# EAGLE board 2017-09-15_drum_circuits (EAGLE 9.0.1)
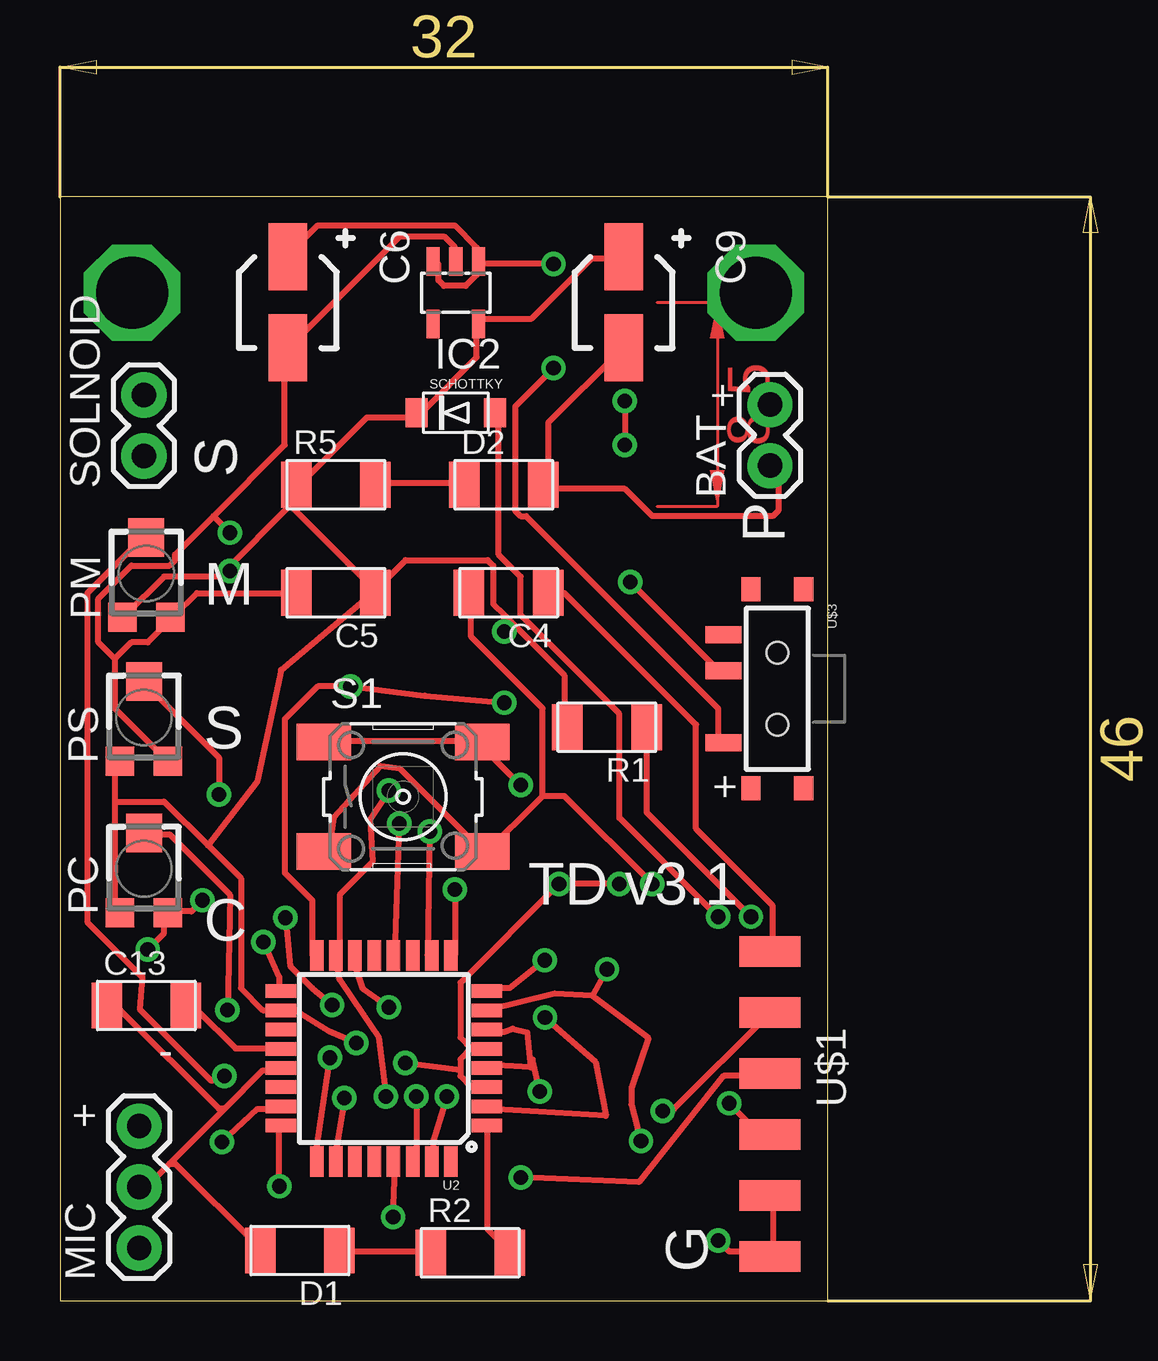
[diagram p0: board, top side]
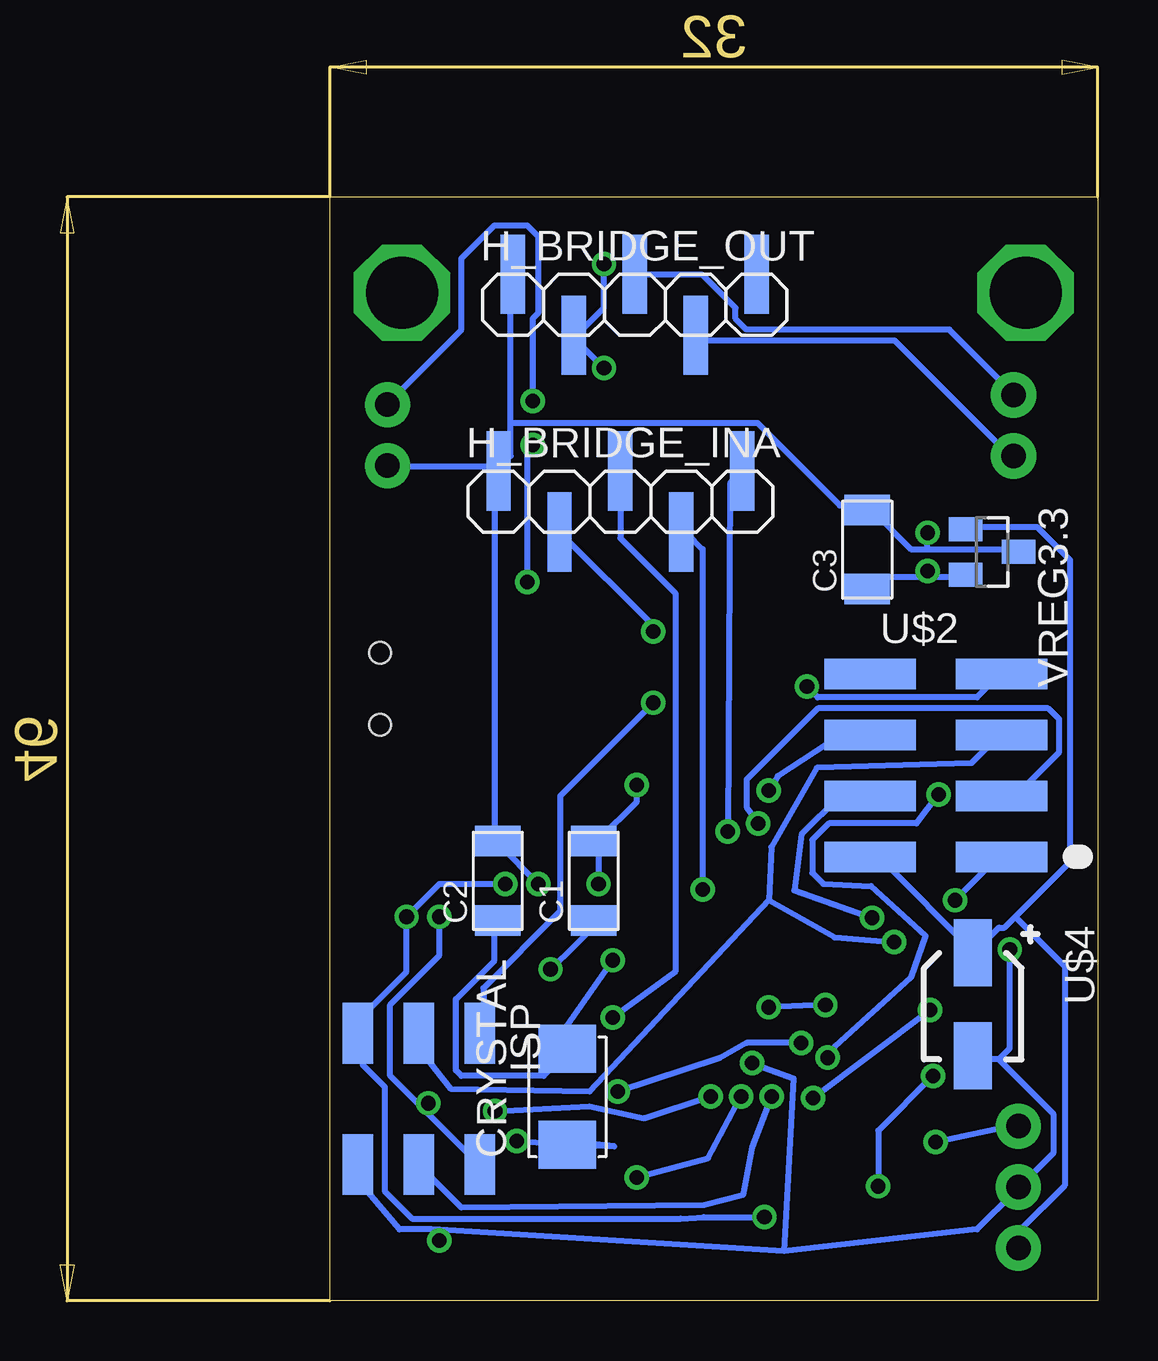
[diagram p1: board, bottom side, seen from below]

Size 32 x 46 mm. Coordinates in mm from the lower left corner, seen from the top.
Outline: 0,0 32,0 32,46 0,46 0,0
Copper layers (1*16): Top 0.035mm / dielectric 1.5mm / Bottom 0.035mm
Design rules "default": minimum track width 10mil, minimum drill 24mil, track to track 8mil, track to pad 8mil, pad to pad 8mil, via to via 8mil, smd to smd 8mil, copper to edge 40mil, drill to drill 8mil, minimum pad ring 10mil, minimum via ring 8mil, stop-mask expansion 4mil, vias tented up to drill 0mil, thermal gap 10mil

## Footprints (pad centres in the part's own frame; a part is rotated, then mirrored left to right if it is on the bottom)
1X02 = drill 1.016 pad 1.88: 1 0,0; 2 2.54,0
C1206FAB = smd 1.27 x 1.905: 1 -1.651,0; 2 1.651,0
PANASONIC-CAP-SMD-B = smd 1.6 x 2.794: NEG 0,3.794; POS 0,0
2-SMD-5X3MM = smd 2 x 2.4: P$1 -2,0; P$2 2,0
LED1206FAB = smd 1.27 x 1.905: 1 -1.651,0; 2 1.651,0
1X05SMD = smd 1.016 x 3.302: 1 -1.27,1.27; 2 1.27,-1.27; 3 3.81,1.27; 4 6.35,-1.27; 5 8.89,1.27
SOT23-5L = smd 0.55 x 1.2: 1 -0.95,-1.3; 2 0,-1.3; 3 0.95,-1.3; 4 0.95,1.3; 5 -0.95,1.3
2X03SMD = smd 2.54 x 1.27: 1 -2.54,2.54; 2 2.92,2.54; 3 -2.54,0; 4 2.92,0; 5 -2.54,-2.54; 6 2.92,-2.54
1X03 = drill 1.016 pad 1.88: 1 0,0; 2 2.54,0; 3 5.08,0
TC33X = smd 1.2 x 1.2: 1 -1,-1.825; 3 1,-1.825 | smd 1.5 x 1.6: 2 0,1.5
R1206FAB = smd 1.27 x 1.905: 1 -1.651,0; 2 1.651,0
6MM_SWITCH = smd 2.286 x 1.524: 1 -3.302,2.286; 2 3.302,2.286; 3 -3.302,-2.286; 4 3.302,-2.286
SOD-123FL = smd 0.91 x 1.22: A 1.637,0; C -1.637,0
TQFP32-08 = smd 1.27 x 0.559: 1 -4.293,2.8; 2 -4.293,2; 3 -4.293,1.2; 4 -4.293,0.4; 5 -4.293,-0.4; 6 -4.293,-1.2; 7 -4.293,-2; 8 -4.293,-2.8; 17 4.293,-2.8; 18 4.293,-2; 19 4.293,-1.2; 20 4.293,-0.4; 21 4.293,0.4; 22 4.293,1.2; 23 4.293,2; 24 4.293,2.8 | smd 0.559 x 1.27: 9 -2.8,-4.293; 10 -2,-4.293; 11 -1.2,-4.293; 12 -0.4,-4.293; 13 0.4,-4.293; 14 1.2,-4.293; 15 2,-4.293; 16 2.8,-4.293; 25 2.8,4.293; 26 2,4.293; 27 1.2,4.293; 28 0.4,4.293; 29 -0.4,4.293; 30 -1.2,4.293; 31 -2,4.293; 32 -2.8,4.293
1X06SMD = smd 2.54 x 1.27: 1 0,6.35; 2 0,3.81; 3 0,1.27; 4 0,-1.27; 5 0,-3.81; 6 0,-6.35
2.54MM = smd 3.81 x 1.27: 1 0,0; 2 -5.486,0; 3 0,2.54; 4 -5.486,2.54; 5 0,5.08; 6 -5.486,5.08; 7 0,7.62; 8 -5.486,7.62
KPS-1290 = smd 0.7 x 1.5: O -2.25,2.25; P 0.75,2.25; S 2.25,2.25 | smd 1 x 0.8: P$1 -4.15,1.1; P$2 -4.15,-1.1; P$3 4.15,-1.1; P$4 4.15,1.1 | hole 0.9: -1.5,0; 1.5,0
PANASONIC-CAP-SMD-C = smd 1.6 x 2.794: NEG 0,4.294; POS 0,0
SOT23 = smd 1 x 1.4: 1 -0.95,-1.1; 2 0.95,-1.1; 3 0,1.1

## Placement (x,y rotation side)
BAT  [1X02]  29.6,34.8 90 top
C1  22pF  [C1206FAB]  21,17.5 90 bottom
C2  22pF  [C1206FAB]  25,17.5 90 bottom
C3  0.1uF  [C1206FAB]  9.6,31.3 90 bottom
C4  0.1uF  [C1206FAB]  18.7,29.5 180 top
C5  1uF  [C1206FAB]  11.5,29.5 180 top
C6  10uF  [PANASONIC-CAP-SMD-B]  9.5,43.5 180 top
C9  10uF  [PANASONIC-CAP-SMD-B]  23.5,43.5 180 top
C13  0.1uF  [C1206FAB]  3.6,12.3 0 top
CRYSTAL  16MHz  [2-SMD-5X3MM]  22.1,8.5 90 bottom
D1  LEDFAB1206  [LED1206FAB]  10,2.1 180 top
D2  LEDFAB1206  [LED1206FAB]  18.5,34 0 top
H_BRIDGE_INA  [1X05SMD]  23.7,33.3 0 bottom
H_BRIDGE_OUT  [1X05SMD]  23.1,41.5 0 bottom
IC2  MIC5225-5v  [SOT23-5L]  16.5,42 180 top
ISP  [2X03SMD]  28.3,8.6 270 bottom
MIC  [1X03]  3.3,2.2 90 top
PC  [TC33X]  3.5,18 0 top
PM  [TC33X]  3.6,30.3 0 top
PS  [TC33X]  3.5,24.3 0 top
R1  10k  [R1206FAB]  22.8,23.9 180 top
R2  500  [R1206FAB]  17.1,2 0 top
R5  500  [R1206FAB]  11.5,34 0 top
S1  [6MM_SWITCH]  14.3,21 0 top
SCHOTTKY  [SOD-123FL]  16.5,37 0 top
SOLNOID  [1X02]  3.5,35.2 90 top
U2  ATMEGA328P_TQFP  [TQFP32-08]  13.5,10.1 180 top
U$1  FTDI-SMD-HEADER  [1X06SMD]  29.6,8.2 180 top
U$2  NRFHEADSMD  [2.54MM]  4,18.5 0 bottom
U$3  SWITCH_SPDT  [KPS-1290]  29.9,25.5 90 top
U$4  33uF  [PANASONIC-CAP-SMD-C]  5.2,14.5 180 bottom
VREG3.3  LD1117  [SOT23]  4.4,31.2 270 bottom

## Library data of the parts
BAT MIC SOLNOID = SparkFun-Connectors
C1-C5 C13 CRYSTAL D1 D2 ISP R1 R2 R5 S1 U$1 VREG3.3 = fab
C6 C9 U$4 = talkingdrums
H_BRIDGE_INA H_BRIDGE_OUT = pinhead-2
IC2 PC PM PS SCHOTTKY = adafruit
U2 = SparkFun-DigitalIC; PROD_ID: IC-09069
U$2 = nrf
U$3 = SparkFun-Electromechanical; PROD_ID: SWCH-10651

## Nets
3.3V: MIC.1 U$2.2 U$4.POS VREG3.3.1
5V: C3.1 C5.1 C9.POS H_BRIDGE_INA.2 IC2.5 PC.1 PM.1 PS.1 R1.2 R5.1 SCHOTTKY.C U2.4 U2.6 U2.18 VREG3.3.2
BAT_IN: BAT.2 U$3.P
CE: U2.12 U$2.3
CSN: U2.14 U$2.4
DTR: C4.1 U$1.6
ENABLE: H_BRIDGE_INA.3 U2.2
GND: BAT.1 C1.2 C2.2 C3.2 C5.2 C6.NEG C9.NEG C13.1 D1.2 D2.2 H_BRIDGE_INA.1 H_BRIDGE_OUT.1 IC2.2 ISP.6 MIC.2 PC.3 PM.3 PS.3 S1.1 S1.2 U2.3 U2.5 U2.21 U$1.1 U$1.2 U$2.1 U$4.NEG VREG3.3.3
MIC: MIC.3 U2.23
MISO: ISP.1 U2.16 U$2.7
MOSI: ISP.4 U2.15 U$2.6
N$1: D1.1 R2.1
N$6: D2.1 R5.2
N$9: C13.2 U2.20
N$10: R2.2 U2.1
OUT: U$3.S
PHASE: H_BRIDGE_INA.4 U2.9
PM: PM.2 U2.24
POT_C: PC.2 U2.26
POT_S: PS.2 U2.25
RST: C4.2 ISP.5 R1.1 S1.3 S1.4 U2.29
RX: U2.31 U$1.5
SCK: ISP.3 U2.17 U$2.5
SLEEP: H_BRIDGE_INA.5 U2.10
SOL_1: H_BRIDGE_OUT.4 SOLNOID.1
SOL_2: H_BRIDGE_OUT.3 SOLNOID.2
TX: U2.30 U$1.4
VBUS: ISP.2 SCHOTTKY.A U$1.3
VCC: C6.POS H_BRIDGE_OUT.2 IC2.1 IC2.3 U$3.O
VM: H_BRIDGE_OUT.5
XTAL1: C1.1 CRYSTAL.P$1 U2.7
XTAL2: C2.1 CRYSTAL.P$2 U2.8

## Tracks (layer width: path | path; a pad name or v marks a point on that pad's centre or on a via)
3.3V
  Bottom 0.254: 3.43,16 3.89,15.54 4.12,15.54 5.03,14.63 U$4.POS 5.26,14.63 8.91,18.29 9.37,18.29 U$2.2 | 3.43,16 1.14,18.29 1.14,30.86 2.52,32.23 5.49,32.23 VREG3.3.1 | 3.43,16 1.37,13.95 1.37,4.8 3.2,2.97 3.2,2.29 MIC.1
5V  (via drill 0.61)
  Top 0.254: 19.62,9.73 17.83,9.83 U2.4 | 19.62,9.73 19.47,11.19 18.87,11.34 18.52,11.2 17.83,11.2 U2.6 | 2.29,20.8 2.29,22.4 PS.1 | 2.29,20.8 2.29,16.23 PC.1 | 6.17,18.97 4.34,20.8 2.29,20.8 | 6.17,18.97 7.54,17.6 7.54,13.03 8.46,12.12 9.14,12.12 U2.18 9.37,12.12 9.83,12.12 11.2,11.24 v12.36,10.74 | 19.62,9.73 19.7,10.04 v20,8.71 | C9.POS 23.32,43.43 22.17,43.43 19.66,40.92 17.6,40.92 IC2.5 17.37,40.69 17.37,39.32 15.09,37.03 SCHOTTKY.C 14.86,36.8 12.8,36.8 10.06,34.06 R5.1 | 9.6,33.15 9.83,33.38 9.83,33.83 R5.1 | 9.6,33.15 6.86,30.4 | 6.86,30.4 6.63,30.18 4.34,30.18 2.74,28.57 PM.1 | 6.86,30.4 v7.09,30.4 | 18.52,28.57 18.06,29.03 18.06,30.63 17.83,30.86 14.4,30.86 13.26,29.72 C5.1 | 18.52,28.57 21.03,26.06 21.03,24 R1.2 | 18.52,28.57 v18.52,27.89 | 9.6,33.15 13.03,29.72 C5.1 | 9.6,33.15 R5.1 | 6.17,18.97 8.21,21.62 9.21,26.27 13.03,29.49 C5.1
  Bottom 0.254: v20,8.71 15.76,10.12 14.63,10.74 v12.36,10.74 | 7.09,30.18 8.91,30.18 9.37,29.72 C3.1 | 7.09,30.18 5.71,30.18 VREG3.3.2 | v7.09,30.4 7.09,30.18 | v18.52,27.89 18.52,28.12 22.4,32 H_BRIDGE_INA.2
BAT_IN  (via drill 0.61)
  Top 0.254: v23.77,29.95 27.43,26.29 U$3.P | v23.55,37.49 v23.55,35.66
  Bottom 0.254: v23.77,29.95 23.77,35.43 v23.55,35.66 | v23.55,37.49 23.55,40.92 23.32,41.15 23.32,44.35 23.77,44.81 25.15,44.81 26.52,43.43 26.52,40.46 29.49,37.49 BAT.2
CE  (via drill 0.61)
  Top 0.254: v14.14,19.89 13.95,14.4 U2.12
  Bottom 0.254: v14.14,19.89 14.63,20.57 14.63,21.72 11.66,24.69 2.06,24.69 1.6,24.23 1.6,22.86 3.2,21.26 3.89,21.26 U$2.3
CSN  (via drill 0.61)
  Top 0.254: v13.7,12.23 12.64,12.99 12.24,14.17 U2.14 | v11.34,12.33 10.52,13.03 9.6,13.95 v9.4,15.96
  Bottom 0.254: v11.34,12.33 v13.7,12.23 | v9.4,15.96 12.64,17.1 12.34,19.43 10.74,21.03 9.6,21.03 U$2.4
DTR
  Top 0.254: C4.1 20.57,29.49 21.03,29.49 26.52,24 26.52,19.66 29.72,16.46 29.72,14.63 U$1.6
ENABLE  (via drill 0.61)
  Top 0.254: v20.22,11.8 22.32,9.96 22.76,7.7 17.83,8 U2.2
  Bottom 0.254: v20.22,11.8 17.6,13.72 17.6,29.49 19.89,31.77 19.89,34.52 H_BRIDGE_INA.3
GND  (via drill 0.61)
  Top 0.254: v5.94,16.69 5.49,16.23 4.57,16.23 PC.3 4.34,16 4.34,15.32 v3.66,14.63 | U$1.2 29.72,4.34 29.72,2.06 U$1.1 29.49,2.06 27.89,2.06 v27.43,2.52 | 4.57,5.71 3.43,4.57 MIC.2 | 4.57,5.71 6.86,8 | 6.86,8 8.46,9.6 9.14,9.6 U2.21 | 4.57,5.71 4.8,5.71 8.23,2.29 D1.2 | 6.86,8 6.63,8 2.52,12.12 C13.1 | IC2.2 16.46,43.43 16.46,43.89 16,44.35 14.17,44.35 9.6,39.78 C6.NEG 9.37,39.55 9.37,35.66 6.4,32.69 | 2.29,26.75 2.29,24.69 4.34,22.63 PS.3 | 2.29,26.75 2.97,27.43 3.66,27.43 4.57,28.35 PM.3 4.8,28.57 5.71,29.49 9.83,29.49 C5.2 | 6.4,32.69 4.8,31.09 4.8,30.86 4.57,30.63 2.97,30.63 1.6,29.26 1.6,27.43 2.29,26.75 | S1.1 11.2,23.32 17.37,23.32 S1.2 17.6,23.09 v19.2,21.49 | 16.69,9.6 16.69,10.06 17.14,10.52 | 16.69,9.6 16.69,9.37 17.14,8.91 17.6,8.91 U2.3 | 17.14,10.52 17.6,10.52 U2.5 | 17.14,10.52 16.69,10.97 16.69,13.26 v20.8,17.37 v23.32,17.37 | C9.NEG 23.32,39.55 20.34,36.58 20.34,34.06 D2.2 20.34,33.83 23.55,33.83 24.69,32.69 29.72,32.69 29.95,32.92 29.95,34.52 29.72,34.75 BAT.1 | v7.09,32 6.4,32.69 | 16.69,9.6 v14.4,9.9
  Bottom 0.254: v5.94,16.69 4.12,18.52 U$2.1 | 13.07,2.07 5.03,2.97 3.43,4.57 MIC.2 3.2,4.8 1.83,6.17 1.83,7.77 4.12,10.06 | 13.07,2.07 27.73,2.97 | 27.73,2.97 29.1,2.97 30.63,4.8 30.63,5.49 ISP.6 | 4.12,10.06 5.03,10.06 U$4.NEG | 27.73,2.97 v27.43,2.52 | v3.66,14.63 3.66,10.52 4.12,10.06 | v20.8,17.37 20.8,18.97 C1.2 20.8,19.2 19.2,20.8 v19.2,21.49 | 7.09,31.32 7.77,31.32 9.37,32.92 C3.2 9.6,33.15 10.74,33.15 14.17,36.58 24.46,36.58 | 7.09,31.32 3.43,31.32 VREG3.3.3 | H_BRIDGE_INA.1 25.15,34.52 25.15,19.2 C2.2 24.92,18.97 v23.32,17.37 | 24.46,36.58 24.46,35.2 24.92,34.75 H_BRIDGE_INA.1 | 24.46,36.58 24.46,42.75 H_BRIDGE_OUT.1 | BAT.1 29.49,34.75 25.15,34.75 H_BRIDGE_INA.1 | 7.09,31.32 v7.09,32 | 13.07,2.07 12.67,9.27 v14.4,9.9
MIC  (via drill 0.61)
  Top 0.254: v6.74,6.62 8.23,8 9.14,8 U2.23
  Bottom 0.254: v6.74,6.62 3.43,7.32 MIC.3
MISO  (via drill 0.61)
  Top 0.254: U2.16 10.52,14.4 10.52,16.69 9.37,17.83 9.37,24.23 10.74,25.6 v12.12,25.6 15.2,25.22 v18.52,24.92
  Bottom 0.254: v12.12,25.6 11.66,25.15 5.03,25.15 4.12,26.06 U$2.7 | v18.52,24.92 22.4,21.03 22.4,16.23 25.6,13.03 25.6,11.2 ISP.1
MOSI  (via drill 0.61)
  Top 0.254: v13.72,21.26 12.93,20.07 13.03,18.29 11.66,16.92 11.66,14.4 U2.15 11.66,13.37 12.66,11.9 13.29,10.97 v13.59,8.52
  Bottom 0.254: v13.72,21.26 13.33,21.86 10.74,23.55 9.6,23.55 U$2.6 | v13.59,8.52 14.4,6.4 14.79,4.4 16.4,3.99 26.52,3.89 28.12,5.49 ISP.4
N$1
  Top 0.254: R2.1 15.32,2.06 11.66,2.06 D1.1
N$3  (via drill 3 pad 1)
  other vias: 3,42
N$5  (via drill 3 pad 1)
  other vias: 29,42
N$6
  Top 0.254: R5.2 13.26,34.06 16.69,34.06 D2.1
N$9
  Top 0.254: U2.20 9.14,10.52 7.32,10.52 5.71,12.12 C13.2
N$10
  Top 0.254: U2.1 17.83,7.09 17.83,2.97 18.75,2.06 R2.2
PHASE  (via drill 0.61)
  Top 0.254: v16.46,17.14 16.46,14.4 U2.9
  Bottom 0.254: v16.46,17.14 16.46,31.32 17.14,32 H_BRIDGE_INA.4
PM  (via drill 0.61)
  Top 0.254: v9.14,4.77 9.14,7.09 U2.24 | v6.86,9.37 6.3,9.17 3.33,12.14 3.43,13.49 1.14,15.77 1.14,29.49 3.43,31.77 PM.2
  Bottom 0.254: v9.14,4.77 9.14,7.09 v6.86,9.37
POT_C  (via drill 0.61)
  Top 0.254: v11.86,8.44 11.46,6.04 U2.26 | v6.99,12.12 7.09,16.92 4.57,19.43 3.66,19.43 PC.2
  Bottom 0.254: v6.99,12.12 v11.86,8.44
POT_S  (via drill 0.61)
  Top 0.254: v11.24,10.13 10.64,6.04 U2.25 | v6.63,21.1 6.63,22.63 3.66,25.6 PS.2
  Bottom 0.254: v11.24,10.13 10.94,10.62 7.77,13.49 7.17,15.2 9.44,17.27 11.43,17.37 11.89,17.83 11.89,19.2 11.2,19.89 7.54,19.89 v6.63,21.1
RST  (via drill 0.61)
  Top 0.254: 20.12,21.03 20.12,24.69 17.14,27.66 17.14,29.49 C4.2 | 20.12,21.03 17.6,18.52 S1.4 17.6,18.75 14.17,22.17 13.36,22.27 11.4,20.12 11.2,18.75 S1.3 | v13.89,3.49 13.95,5.03 13.95,5.71 U2.29 | v28.8,16 24.46,20.34 24.46,23.77 R1.1 | 20.12,21.03 21.03,21.03 v24.69,17.37
  Bottom 0.254: v13.89,3.49 16.42,3.49 17.37,3.43 28.57,3.43 29.72,4.57 29.72,8.91 30.63,9.83 30.63,10.97 ISP.5 30.63,11.2 30.63,11.89 28.8,13.72 v28.8,16 27.43,17.37 v24.69,17.37
RX  (via drill 0.61)
  Top 0.254: v16.13,8.52 15.54,6.63 15.54,5.94 U2.31 | v25.12,7.9 25.6,8 29.49,11.89 U$1.5
  Bottom 0.254: v16.13,8.52 18.9,7.62 21.19,8.1 v25.12,7.9
SCK  (via drill 0.61)
  Top 0.254: v8.49,14.95 9.14,13.49 9.14,13.03 U2.17
  Bottom 0.254: v8.49,14.95 10.96,15.14 13.7,16.69 | 13.7,16.69 13.6,18.9 11.7,22.2 5.26,22.4 4.12,23.55 U$2.5 | 13.7,16.69 21.17,8.71 26.95,8.81 28.12,10.29 28.12,10.97 ISP.3
SLEEP  (via drill 0.61)
  Top 0.254: v15.42,19.56 15.32,14.4 U2.10
  Bottom 0.254: v15.42,19.56 15.32,34.06 14.86,34.52 H_BRIDGE_INA.5
SOL_1
  Bottom 0.254: H_BRIDGE_OUT.4 16.69,40.01 8.46,40.01 3.66,35.2 SOLNOID.1
SOL_2
  Bottom 0.254: H_BRIDGE_OUT.3 19.2,42.75 16.46,42.75 15.09,41.38 15.09,40.92 14.63,40.46 6.17,40.46 3.66,37.95 SOLNOID.2
TX  (via drill 0.61)
  Top 0.254: v14.86,8.52 14.86,5.94 U2.30 | v19.2,5.14 24.13,4.94 27.66,9.37 29.49,9.37 U$1.4
  Bottom 0.254: v14.86,8.52 16.23,5.94 v19.2,5.14
VBUS  (via drill 0.61)
  Top 0.254: v27.43,16 23.32,20.12 23.32,24.46 19.2,28.57 19.2,30.18 18.29,31.09 18.29,36.8 SCHOTTKY.A | v27.89,8.23 29.03,7.09 29.49,7.09 U$1.3
  Bottom 0.254: v27.43,16 27.43,14.4 29.49,12.34 29.49,9.37 28.12,8 | 28.12,8 25.83,5.71 ISP.2 | 28.12,8 v27.89,8.23
VCC  (via drill 0.61)
  Top 0.254: IC2.3 15.77,43.2 15.77,42.52 16,42.29 16.92,42.29 17.37,42.75 17.37,43.2 IC2.1 | IC2.1 17.37,43.43 17.37,43.89 16.46,44.81 10.74,44.81 9.6,43.66 C6.POS | v20.57,38.86 18.97,37.26 18.97,32.92 19.2,32.69 19.43,32.69 27.43,24.69 27.43,23.32 U$3.O | v20.57,43.2 17.6,43.2 IC2.1
  Bottom 0.254: v20.57,38.86 21.72,40.01 H_BRIDGE_OUT.2 21.72,40.23 20.57,41.38 v20.57,43.2
XTAL1  (via drill 0.61)
  Top 0.254: v22.8,13.82 22.2,12.71 | 22.2,12.71 20.62,12.8 17.83,12.12 U2.7 | v24.22,6.66 23.82,8.17 23.83,8.89 24.53,10.96 22.2,12.71
  Bottom 0.254: v22.8,13.82 20.8,15.77 C1.1 | v24.22,6.66 20.14,6.43 21.95,6.63 CRYSTAL.P$1
XTAL2  (via drill 0.61)
  Top 0.254: v20.2,14.19 18.75,13.03 17.83,13.03 U2.8
  Bottom 0.254: v20.2,14.19 22.27,11.22 CRYSTAL.P$2 22.17,10.29 23.09,9.37 26.52,9.37 26.75,9.6 26.75,12.57 25.15,14.17 25.15,15.77 C2.1
(copper drawn outside any net)
  shapes: Top area x1

## Text on the board
tPlace: + | S | - | P | M | S | + | TD v3.1 | C | - | + | G